# EAGLE board four (EAGLE 6.5.0)
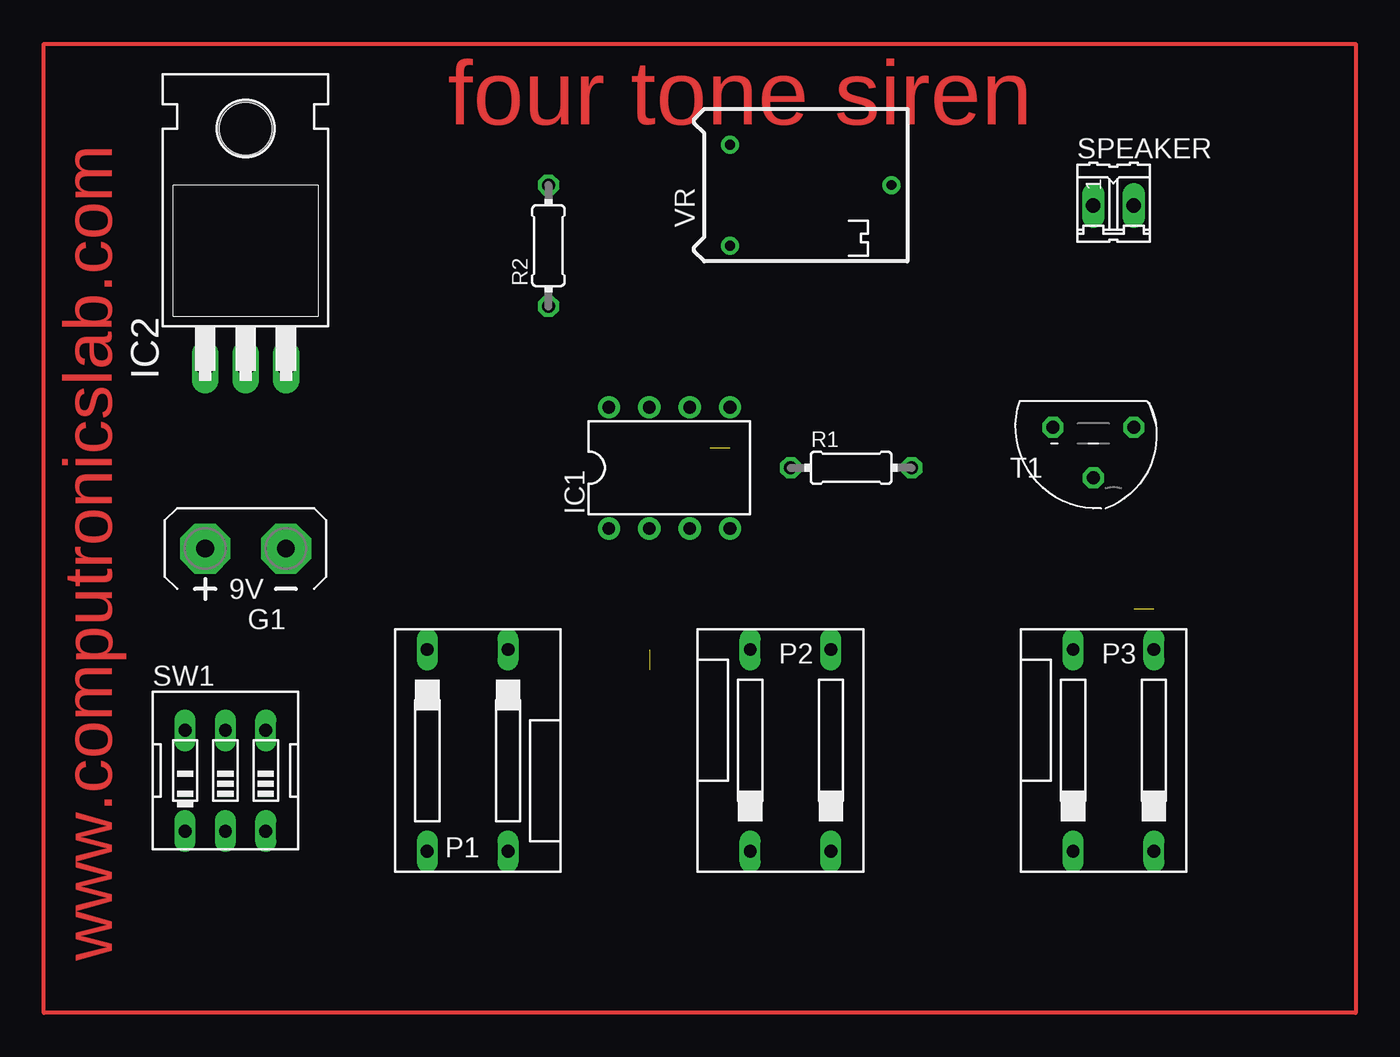
[diagram p0: board, top side]
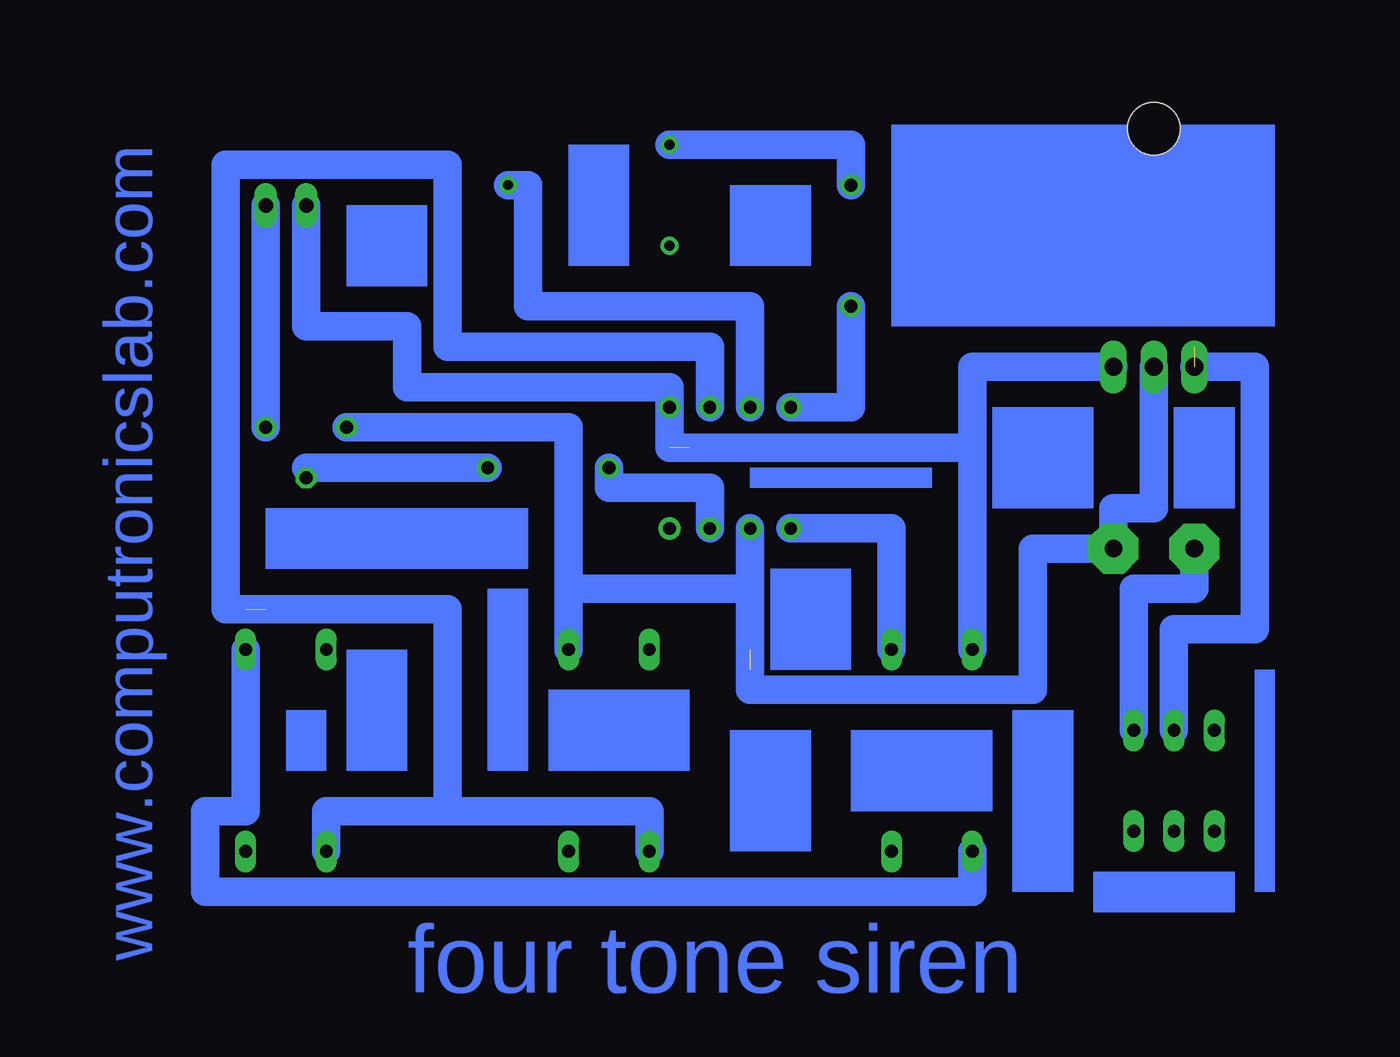
[diagram p1: board, bottom side, seen from below]

No outline drawn. Coordinates in mm, seen from the top.
Copper layers (1*16): Top 0.035mm / dielectric 1.5mm / Bottom 0.035mm
Design rules "default": minimum track width 10mil, minimum drill 24mil, track to track 8mil, track to pad 8mil, pad to pad 8mil, via to via 8mil, smd to smd 8mil, copper to edge 40mil, drill to drill 8mil, minimum pad ring 10mil, minimum via ring 8mil, stop-mask expansion 4mil, vias tented up to drill 0mil, thermal gap 10mil

## Footprints (pad centres in the part's own frame; a part is rotated, then mirrored left to right if it is on the bottom)
AB9V = drill 1.118 pad 3.15 octagon: + 0,2.54; - 0,-2.54
DIL08 = drill 0.8 pad 1.4: 1 -3.81,-3.81; 2 -1.27,-3.81; 3 1.27,-3.81; 4 3.81,-3.81; 5 3.81,3.81; 6 1.27,3.81; 7 -1.27,3.81; 8 -3.81,3.81
TO220H = drill 1.118 long: 1 -2.54,-10.16; 2 0,-10.16; 3 2.54,-10.16 | hole 3.302: 0,4.826
DS-02 = drill 0.813 long: 1 -5.08,-6.35; 2 0,-6.35; 3 0,6.35; 4 -5.08,6.35
0204/7 = drill 0.813 octagon: 1 -3.81,0; 2 3.81,0
02P = drill 0.914 long: 1 -1.27,0; 2 1.27,0
EDG-03 = drill 0.813 long: 1 -2.54,-3.81; 2 0,-3.81; 3 2.54,-3.81; 4 2.54,2.54; 5 0,2.54; 6 -2.54,2.54
TO92 = drill 0.813 octagon: 1 2.54,-1.27; 2 0,1.905; 3 -2.54,-1.27
RTRIM64P = drill 0.61: 1 -2.54,-3.81; 2 7.62,0; 3 -2.54,2.54

## Placement (x,y rotation side)
G1  AB9V  [AB9V]  5.08,39.37 90 top
IC1  UM3561  [DIL08]  31.75,44.45 0 top
IC2  7805T  [TO220H]  5.08,60.96 0 top
P1  push switch1  [DS-02]  16.51,26.67 180 top
P2  push swich2  [DS-02]  41.91,26.67 0 top
P3  push switch3  [DS-02]  62.23,26.67 0 top
R1  10k  [0204/7]  43.18,44.45 0 top
R2  150k  [0204/7]  24.13,58.42 90 top
SPEAKER  8ohms  [02P]  59.69,60.96 0 top
SW1  on/off switch  [EDG-03]  3.81,25.4 0 top
T1  BC547  [TO92]  58.42,45.72 180 top
VR  100k  [RTRIM64P]  38.1,62.23 0 top

## Library data of the parts
G1 = battery
IC1 = ir; MF: INTERNATIONAL RECTIFIER(IR); MPN: IR2520DPBF; OC_FARNELL: 1080633; OC_NEWARK: 63J7916
IC2 = linear
P1-P3 = switch-dil; OC_FARNELL: 9472126; OC_NEWARK: unknown
R1 R2 = eagle-ltspice; SPICEMODEL: NONE; SPICEPREFIX: R
SPEAKER = con-amp-quick; OC_FARNELL: unknown; OC_NEWARK: unknown
SW1 = special
T1 = transistor
VR = resistor

## Nets
N$1: IC1.3 R1.1
N$2: R1.2 T1.2
N$3: SPEAKER.2 T1.3
N$4: IC1.8 R2.1
N$5: R2.2 VR.3
N$6: IC1.7 VR.2
N$7: IC2.1 SW1.5
N$8: G1.- IC1.2 IC2.2 P2.3 T1.1
N$9: IC1.6 P2.1 P3.1
N$10: P2.4
N$11: IC1.5 IC2.3 P1.2 SPEAKER.1
N$12: IC1.1 P1.1
N$14: P1.3 P3.3
N$15: G1.+ SW1.4

## Tracks (layer width: path | path; a pad name or v marks a point on that pad's centre or on a via)
N$1
  Bottom 1.778: R1.1 39.37,43.18 33.02,43.18 IC1.3
N$2
  Bottom 0.254: 58.42,44.45 T1.2
  Bottom 1.778: R1.2 58.42,44.45
N$3
  Bottom 1.778: SPEAKER.2 T1.3
N$4
  Bottom 1.778: R2.1 24.13,48.26 IC1.8
N$5
  Bottom 1.778: R2.2 24.13,64.77 VR.3
N$6
  Bottom 1.778: VR.2 44.45,62.23 44.45,54.61 30.48,54.61 IC1.7
N$7  (1 unrouted)
  Bottom 0.406: IC2.1 2.54,52.07
  Bottom 1.778: SW1.5 3.81,34.29 -1.27,34.29 -1.27,50.8 IC2.1
N$8  (1 unrouted)
  Bottom 0.254: 30.48,36.83 30.48,39.37
  Bottom 1.778: IC2.2 5.08,41.91 7.62,41.91 G1.- 12.7,39.37 12.7,30.48 30.48,30.48 30.48,33.02 | 41.91,36.83 41.91,46.99 T1.1 | 41.91,36.83 P2.3 | IC1.2 30.48,39.37 30.48,31.75 | 41.91,36.83 30.48,36.83
N$9  (1 unrouted)
  Bottom 1.778: P2.1 36.83,22.86 49.53,22.86 | 49.53,22.86 57.15,22.86 P3.1 | IC1.6 33.02,52.07 49.53,52.07 49.53,63.5 63.5,63.5 63.5,35.56 60.96,35.56 | 49.53,22.86 49.53,35.56 62.23,35.56
N$11  (1 unrouted)
  Bottom 1.778: 16.51,45.72 16.51,50.8 IC2.3 | 16.51,45.72 P1.2 | 33.02,45.72 35.56,45.72 IC1.5 35.56,49.53 50.8,49.53 52.07,49.53 52.07,53.34 58.42,53.34 SPEAKER.1 | 16.51,45.72 34.29,45.72
N$12
  Bottom 1.778: P1.1 21.59,40.64 IC1.1
N$13
  Top 0.254: -7.62,71.12 74.93,71.12 74.93,10.16 -7.62,10.16 -7.62,71.12
N$14
  Bottom 1.778: P1.3 16.51,19.05 16.51,17.78 19.05,17.78 57.15,17.78 64.77,17.78 64.77,22.86 62.23,22.86 P3.3
N$15
  Bottom 1.778: SW1.4 6.35,36.83 5.08,36.83 2.54,36.83 G1.+
(copper drawn outside any net)
  shapes: Bottom area x18

## Text on the board
Top: four tone siren | www.computronicslab.com
Bottom: www.computronicslab.com | four tone siren